# Altium PCB relay.PcbDoc (part 2 of 4)
Units mil, origin at the board's own origin, x right, y up, seen from the top; angles counter-clockwise.
Board outline 5718.69 x 3947.04 mil, 2 copper layers (Top Layer, Bottom Layer); 122 components, 108 nets, 435 pads, 81 vias.
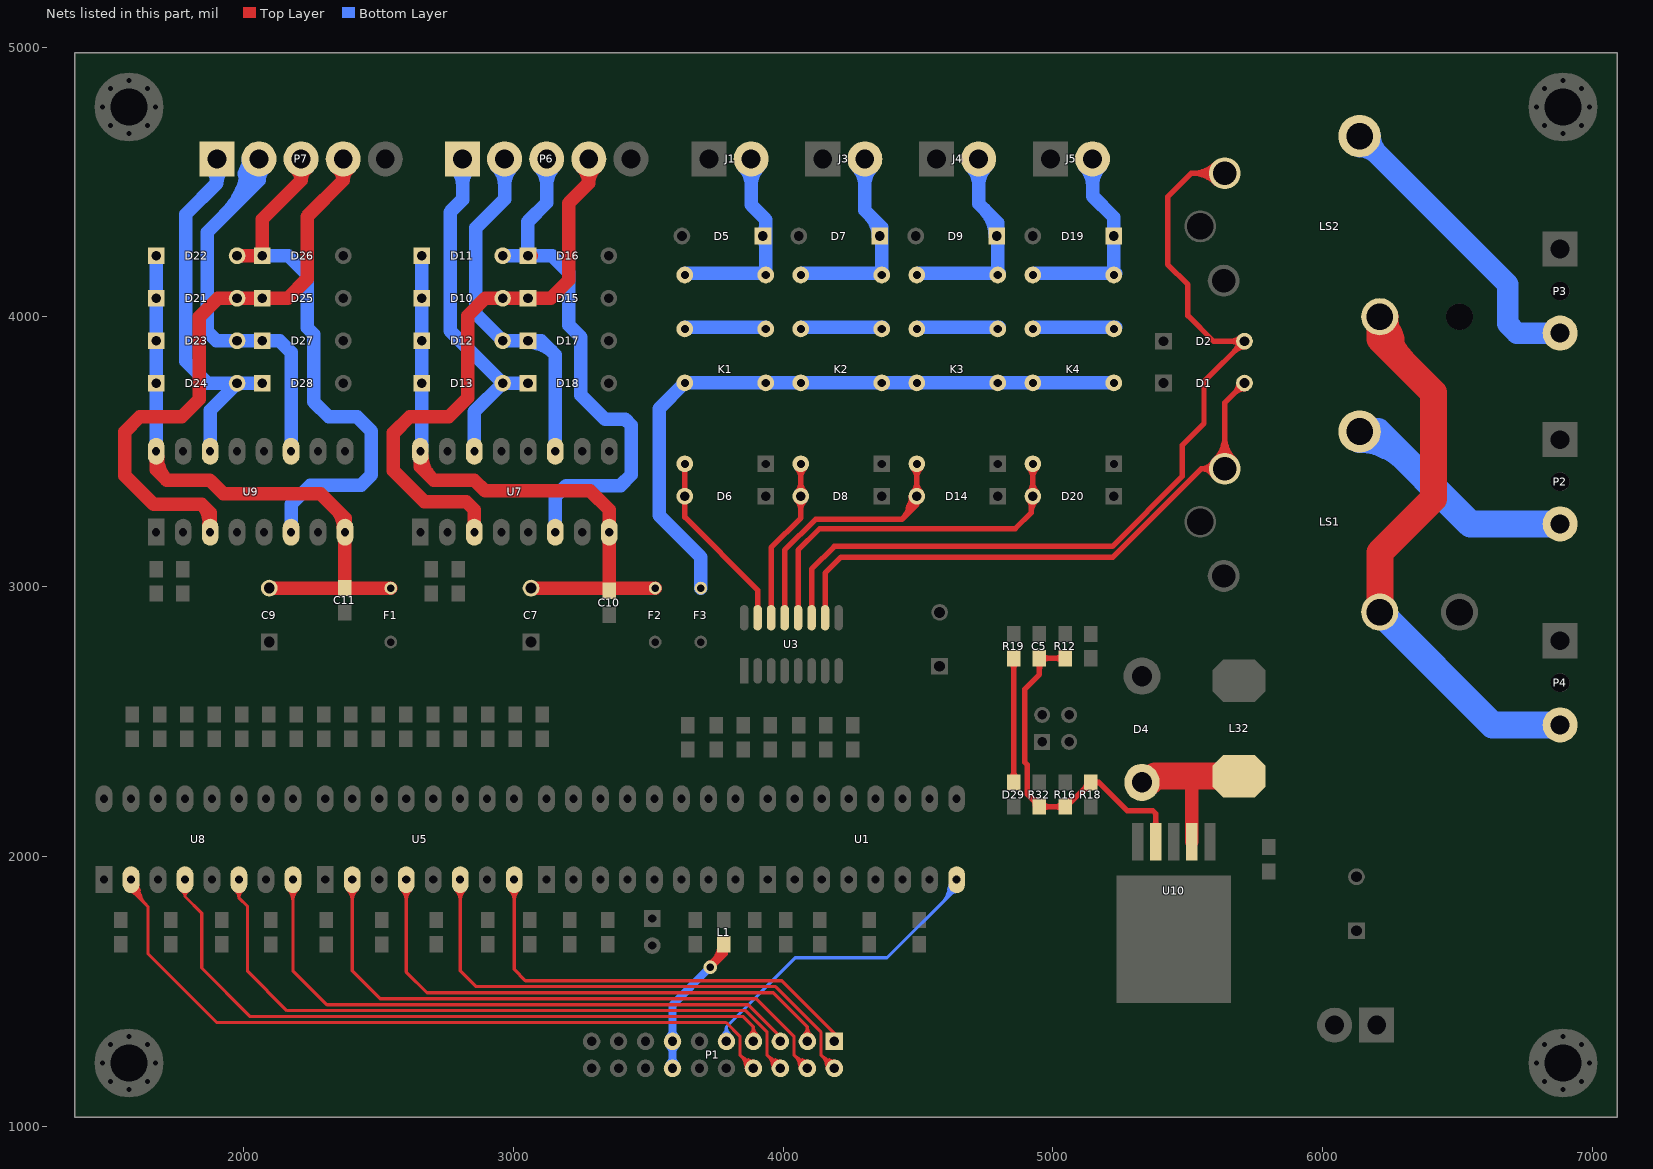
[diagram p2: the nets of this part, all layers, seen from the top]

## Via types
v1: diameter 50, hole 28, Top Layer to Bottom Layer, 42 vias
v2: diameter 50, hole 30, Top Layer to Bottom Layer, 36 vias
v3: diameter 80, hole 50, Top Layer to Bottom Layer, 2 vias
v4: diameter 100, hole 60, Top Layer to Bottom Layer, 1 vias

## Nets (pads, with @x,y where several pads share a name; then routed paths per layer and width w, separated by ;. In a path a pad name is that pad's centre, name@x,y a point inside that pad or via, vN(x,y) a via of type N, cw(c..) or ccw(c..) an arc to the next point about the centre after c; other vN are vias at no path point) (continued)
NetC5_2: C5.2 R12.1 R16.1 R18.1 R32.1 U10.4 | length 2898
  Top Layer w20: R12.1@5045,2735 C5.2@4950,2735 4950,2675 4895,2620 4895,2350 4905,2340 4905,2230 R32.1@4950,2185 R16.1@5045,2185 5050,2185 R18.1@5140,2275 5170,2275 ; U10.4@5381,2055 5381,2159 5370,2170 5275,2170 5170,2275 ; 4915.86,2219.14 ccw(c4950,2253.28) R32.1@4950,2205 ; 4915.86,2219.14 ccw(c4950,2253.28) R32.1@4950,2205 ; 4915.86,2219.14 ccw(c4950,2253.28) R32.1@4950,2205 ; R32.1@4927.93,2207.07 cw(c4910.86,2190) R32.1@4935,2190 ; R32.1@4927.93,2207.07 cw(c4910.86,2190) R32.1@4935,2190 ; R32.1@4927.93,2207.07 cw(c4910.86,2190) R32.1@4935,2190 ; C5.2@4939.39,2719.39 cw(c4913.79,2693.79) 4950,2693.79 ; C5.2@4939.39,2719.39 cw(c4913.79,2693.79) 4950,2693.79 ; C5.2@4939.39,2719.39 cw(c4913.79,2693.79) 4950,2693.79 ; 4950,2693.79 cw(c4986.21,2693.79) C5.2@4960.61,2719.39 ; 4950,2693.79 cw(c4986.21,2693.79) C5.2@4960.61,2719.39 ; 4950,2693.79 cw(c4986.21,2693.79) C5.2@4960.61,2719.39 ; R32.1@4960.61,2174.39 cw(c4986.21,2148.79) 4986.21,2185 ; R32.1@4960.61,2174.39 cw(c4986.21,2148.79) 4986.21,2185 ; R32.1@4960.61,2174.39 cw(c4986.21,2148.79) 4986.21,2185 ; R32.1@4960.61,2195.61 ccw(c4986.21,2221.21) 4986.21,2185 ; R32.1@4960.61,2195.61 ccw(c4986.21,2221.21) 4986.21,2185 ; R32.1@4960.61,2195.61 ccw(c4986.21,2221.21) 4986.21,2185 ; C5.2@4960.61,2724.39 cw(c4986.21,2698.79) 4986.21,2735 ; C5.2@4960.61,2724.39 cw(c4986.21,2698.79) 4986.21,2735 ; C5.2@4960.61,2724.39 cw(c4986.21,2698.79) 4986.21,2735 ; C5.2@4960.61,2745.61 ccw(c4986.21,2771.21) 4986.21,2735 ; C5.2@4960.61,2745.61 ccw(c4986.21,2771.21) 4986.21,2735 ; C5.2@4960.61,2745.61 ccw(c4986.21,2771.21) 4986.21,2735 ; 5008.79,2185 ccw(c5008.79,2221.21) R16.1@5034.39,2195.61 ; 5008.79,2185 cw(c5008.79,2148.79) R16.1@5034.39,2174.39 ; 5008.79,2185 ccw(c5008.79,2221.21) R16.1@5034.39,2195.61 ; 5008.79,2185 cw(c5008.79,2148.79) R16.1@5034.39,2174.39 ; 5008.79,2185 ccw(c5008.79,2221.21) R16.1@5034.39,2195.61 ; 5008.79,2185 cw(c5008.79,2148.79) R16.1@5034.39,2174.39 ; 5008.79,2735 ccw(c5008.79,2771.21) R12.1@5034.39,2745.61 ; 5008.79,2735 cw(c5008.79,2698.79) R12.1@5034.39,2724.39 ; 5008.79,2735 ccw(c5008.79,2771.21) R12.1@5034.39,2745.61 ; 5008.79,2735 cw(c5008.79,2698.79) R12.1@5034.39,2724.39 ; 5008.79,2735 ccw(c5008.79,2771.21) R12.1@5034.39,2745.61 ; 5008.79,2735 cw(c5008.79,2698.79) R12.1@5034.39,2724.39 ; R16.1@5045,2205 ccw(c5045,2265.36) 5087.68,2222.68 ; R16.1@5045,2205 ccw(c5045,2265.36) 5087.68,2222.68 ; R16.1@5045,2205 ccw(c5045,2265.36) 5087.68,2222.68 ; 5105.86,2240.86 cw(c5140,2206.72) R18.1@5140,2255 ; 5105.86,2240.86 cw(c5140,2206.72) R18.1@5140,2255 ; 5105.86,2240.86 cw(c5140,2206.72) R18.1@5140,2255 ; R18.1@5117.93,2252.93 ccw(c5100.86,2270) R18.1@5125,2270 ; R18.1@5117.93,2252.93 ccw(c5100.86,2270) R18.1@5125,2270 ; R18.1@5117.93,2252.93 ccw(c5100.86,2270) R18.1@5125,2270 ; R18.1@5152,2266 cw(c5170,2252.5) 5170,2275 ; R18.1@5152,2266 cw(c5170,2252.5) 5170,2275 ; R18.1@5152,2266 cw(c5170,2252.5) 5170,2275 ; R18.1@5152,2284 ccw(c5170,2297.5) 5170,2275 ; R18.1@5152,2284 ccw(c5170,2297.5) 5170,2275 ; R18.1@5152,2284 ccw(c5170,2297.5) 5170,2275 ; U10.4@5373.22,2110.68 ccw(c5354.44,2129.45) 5381,2129.45 ; U10.4@5373.22,2110.68 ccw(c5354.44,2129.45) 5381,2129.45 ; U10.4@5373.22,2110.68 ccw(c5354.44,2129.45) 5381,2129.45 ; 5381,2129.45 ccw(c5407.56,2129.45) U10.4@5388.78,2110.68 ; 5381,2129.45 ccw(c5407.56,2129.45) U10.4@5388.78,2110.68 ; 5381,2129.45 ccw(c5407.56,2129.45) U10.4@5388.78,2110.68
NetC7_1: C7.1 C10.2 D10.2 D11.2 D12.2 D13.2 F2.1 U7.8 U7.16 | length 2571.4
  Top Layer w50: U7.16@2660.43,3507.05 U7.16@2655.47,3502.09 2655.47,3445.16 2705.63,3395 2855.63,3395 2895.63,3355 3285.63,3355 3355.47,3285.16 U7.8@3355.47,3202.09 3355.63,3201.93 C10.2@3355.63,2995 ; C7.1@3065.63,2995 C10.2@3355.63,2995 ; C10.2@3355.63,2985 C10.2@3365.63,2995 ; F2.1@3525.63,2995 C10.2@3365.63,2995 ; U7.16@2661.47,3483.09 ccw(c2767.53,3483.09) 2692.54,3408.09 ; U7.16@2661.47,3483.09 ccw(c2767.53,3483.09) 2692.54,3408.09 ; U7.16@2661.47,3483.09 ccw(c2767.53,3483.09) 2692.54,3408.09 ; C10.2@3355.63,2995 C10.2@3365.63,2995
  Bottom Layer w50: U7.16@2655.47,3502.09 2660.43,3507.05 D10.2@2660.43,4069.49 D11.2@2660.43,4226.97
NetC9_1: C9.1 C11.2 D21.2 D22.2 D23.2 D24.2 F1.1 U9.8 U9.16 | length 2805
  Top Layer w30: C9.1@2085.63,2985 C9.1@2095.63,2995
  Top Layer w50: U9.16@1676.18,3502.09 1676.18,3434.45 1715.63,3395 ; C9.1@2095.63,2995 C11.2@2375.63,2995 ; F1.1@2545.63,2995 C11.2@2375.63,2995 ; U9.16@1682.17,3482.75 ccw(c1796.84,3476.22) 1715.63,3395 ; U9.16@1682.17,3482.75 ccw(c1796.84,3476.22) 1715.63,3395 ; U9.16@1682.17,3482.75 ccw(c1796.84,3476.22) 1715.63,3395 ; 1715.63,3395 1875.63,3395 1925.63,3345 2285.63,3345 2376.18,3254.45 U9.8@2376.18,3202.09 2375.63,3201.54 C11.2@2375.63,2995 ; 2342.35,3288.28 cw(c2275.15,3221.09) U9.8@2370.18,3221.09 ; 2342.35,3288.28 cw(c2275.15,3221.09) U9.8@2370.18,3221.09 ; 2342.35,3288.28 cw(c2275.15,3221.09) U9.8@2370.18,3221.09
  Bottom Layer w50: U9.16@1676.18,3502.09 D24.2@1676.18,3754.53 D23.2@1676.18,3912.01 D21.2@1676.18,4069.49 D22.2@1676.18,4226.97
NetD1_1: D1.1 LS1.5 U3.10 | length 3853.3
  Top Layer w20: U3.10@4155.63,2885 4155.63,3050.63 4215,3110 5222.43,3110 5550.03,3437.6 ; D1.1@5710,3755 5636.73,3681.73 LS1.5@5636.73,3437.6 5550.03,3437.6 ; 5550.03,3437.6 ccw(c5550.03,3489.69) LS1.5@5594.68,3462.86 ; 5550.03,3437.6 cw(c5550.03,3385.5) LS1.5@5594.68,3412.33 ; 5550.03,3437.6 ccw(c5550.03,3489.69) LS1.5@5594.68,3462.86 ; 5550.03,3437.6 cw(c5550.03,3385.5) LS1.5@5594.68,3412.33 ; 5550.03,3437.6 ccw(c5550.03,3489.69) LS1.5@5594.68,3462.86 ; 5550.03,3437.6 cw(c5550.03,3385.51) LS1.5@5594.68,3412.34 ; LS1.5@5602.05,3472.29 ccw(c5518.3,3556.03) 5636.73,3556.03 ; LS1.5@5602.05,3472.29 ccw(c5518.3,3556.03) 5636.73,3556.03 ; LS1.5@5602.05,3472.29 ccw(c5518.3,3556.03) 5636.73,3556.03 ; LS1.5@5616.19,3458.14 ccw(c5566.59,3507.74) 5636.73,3507.74 ; LS1.5@5616.19,3458.14 ccw(c5566.59,3507.74) 5636.73,3507.74 ; LS1.5@5616.19,3458.14 ccw(c5566.59,3507.74) 5636.73,3507.74 ; 5636.73,3507.74 ccw(c5706.88,3507.74) LS1.5@5657.28,3458.14 ; 5636.73,3507.74 ccw(c5706.88,3507.74) LS1.5@5657.28,3458.14 ; 5636.73,3507.74 ccw(c5706.88,3507.74) LS1.5@5657.28,3458.14 ; 5636.73,3556.03 ccw(c5755.16,3556.03) LS1.5@5671.42,3472.29 ; 5636.73,3556.03 ccw(c5755.16,3556.03) LS1.5@5671.42,3472.29 ; 5636.73,3556.03 ccw(c5755.16,3556.03) LS1.5@5671.42,3472.29 ; 5674.15,3719.15 ccw(c5638.3,3755) D1.1@5689,3755 ; 5674.15,3719.15 cw(c5710,3683.3) D1.1@5710,3734 ; 5674.15,3719.15 ccw(c5638.3,3755) D1.1@5689,3755 ; 5674.15,3719.15 cw(c5710,3683.3) D1.1@5710,3734 ; 5674.15,3719.15 ccw(c5638.3,3755) D1.1@5689,3755 ; 5674.15,3719.15 cw(c5710,3683.3) D1.1@5710,3734 ; 5681.49,3726.98 cw(c5717.73,3717.27) D1.1@5710.2,3754.02 ; 5681.49,3726.98 cw(c5717.73,3717.27) D1.1@5710.2,3754.02 ; 5681.49,3726.98 cw(c5717.73,3717.27) D1.1@5710.2,3754.02 ; 5681.98,3726.49 ccw(c5672.27,3762.73) D1.1@5709.02,3755.2 ; 5681.98,3726.49 ccw(c5672.27,3762.73) D1.1@5709.02,3755.2 ; 5681.98,3726.49 ccw(c5672.27,3762.73) D1.1@5709.02,3755.2
NetD2_1: D2.1 LS2.5 U3.11 | length 4876.9
  Top Layer w20: U3.11@4105.63,2885 4105.63,3065.63 4190,3150 5220,3150 5480,3410 5480,3525 5560,3605 5560,3760 D2.1@5710,3910 5595,3910 5500,4005 5500,4120 5425,4195 5425,4445 5512.4,4532.4 LS2.5@5636.73,4532.4 ; 5518.3,4532.4 ccw(c5518.3,4650.83) LS2.5@5602.05,4567.09 ; 5518.3,4532.4 cw(c5518.3,4413.97) LS2.5@5602.05,4497.71 ; 5518.3,4532.4 ccw(c5518.3,4650.83) LS2.5@5602.05,4567.09 ; 5518.3,4532.4 cw(c5518.3,4413.97) LS2.5@5602.05,4497.71 ; 5518.3,4532.4 ccw(c5518.3,4650.83) LS2.5@5602.05,4567.09 ; 5518.3,4532.4 cw(c5518.3,4413.97) LS2.5@5602.05,4497.71 ; 5566.59,4532.4 ccw(c5566.59,4602.55) LS2.5@5616.19,4552.95 ; 5566.59,4532.4 cw(c5566.59,4462.26) LS2.5@5616.19,4511.86 ; 5566.59,4532.4 ccw(c5566.59,4602.55) LS2.5@5616.19,4552.95 ; 5566.59,4532.4 cw(c5566.59,4462.26) LS2.5@5616.19,4511.86 ; 5566.59,4532.4 ccw(c5566.59,4602.55) LS2.5@5616.19,4552.95 ; 5566.59,4532.4 cw(c5566.59,4462.26) LS2.5@5616.19,4511.86 ; 5659.3,3910 ccw(c5659.3,3960.7) D2.1@5695.15,3924.85 ; 5659.3,3910 cw(c5659.3,3859.3) D2.1@5695.15,3895.15 ; 5659.3,3910 ccw(c5659.3,3960.7) D2.1@5695.15,3924.85 ; 5659.3,3910 cw(c5659.3,3859.3) D2.1@5695.15,3895.15 ; 5659.3,3910 ccw(c5659.3,3960.7) D2.1@5695.15,3924.85 ; 5659.3,3910 cw(c5659.3,3859.3) D2.1@5695.15,3895.15 ; 5674.15,3874.15 ccw(c5638.3,3910) D2.1@5689,3910 ; 5674.15,3874.15 cw(c5710,3838.3) D2.1@5710,3889 ; 5674.15,3874.15 ccw(c5638.3,3910) D2.1@5689,3910 ; 5674.15,3874.15 cw(c5710,3838.3) D2.1@5710,3889 ; 5674.15,3874.15 ccw(c5638.3,3910) D2.1@5689,3910 ; 5674.15,3874.15 cw(c5710,3838.3) D2.1@5710,3889 ; 5681.49,3881.98 cw(c5717.73,3872.27) D2.1@5710.2,3909.02 ; 5681.49,3881.98 cw(c5717.73,3872.27) D2.1@5710.2,3909.02 ; 5681.49,3881.98 cw(c5717.73,3872.27) D2.1@5710.2,3909.02 ; 5681.98,3881.49 ccw(c5672.27,3917.73) D2.1@5709.02,3910.2 ; 5681.98,3881.49 ccw(c5672.27,3917.73) D2.1@5709.02,3910.2 ; 5681.98,3881.49 ccw(c5672.27,3917.73) D2.1@5709.02,3910.2
NetD4_2: D4.2 L32.1 U10.2 | length 886.8
  Top Layer w50: U10.2@5515,2055 5515,2265 5525,2275 ; L32.1@5625.99,2328.21 cw(c5525.01,2397.41) 5525.01,2275 ; L32.1@5690,2297.83 5667.17,2275 5525,2275
  Top Layer w100: D4.2@5330,2275 5355,2275 5377.83,2297.83 L32.1@5690,2297.83
NetD5_2: D5.2 J1.2 K1.8 K1.9 | length 1446.7
  Bottom Layer w50: K1.9@3636.36,4161.3 K1.8@3935.63,4161.3 ; J1.2@3881.63,4585.55 3881.63,4415 3935.63,4361 K1.8@3935.63,4161.3 ; K1.8@3935.63,4155.55 K1.8@3935.63,4161.3 ; K1.8@3936.36,4161.3 K1.8@3935.63,4161.3 ; J1.2@3853.35,4557.27 cw(c3785.06,4488.98) 3881.63,4488.98 ; J1.2@3853.35,4557.27 cw(c3785.06,4488.98) 3881.63,4488.98 ; J1.2@3853.35,4557.27 cw(c3785.06,4488.98) 3881.63,4488.98 ; 3881.63,4488.98 cw(c3978.2,4488.98) J1.2@3909.91,4557.27 ; 3881.63,4488.98 cw(c3978.2,4488.98) J1.2@3909.91,4557.27 ; 3881.63,4488.98 cw(c3978.2,4488.98) J1.2@3909.91,4557.27 ; D5.2@3920.76,4295.76 cw(c3884.85,4259.85) 3935.63,4259.85 ; D5.2@3920.76,4295.76 cw(c3884.85,4259.85) 3935.63,4259.85 ; D5.2@3920.76,4295.76 cw(c3884.85,4259.85) 3935.63,4259.85 ; D5.2@3920.76,4304.24 ccw(c3884.85,4340.15) 3935.63,4340.15 ; D5.2@3920.76,4304.24 ccw(c3884.85,4340.15) 3935.63,4340.15 ; D5.2@3920.76,4304.24 ccw(c3884.85,4340.15) 3935.63,4340.15
NetD6_1: D6.1 K1.16 U3.15 | length 682.4
  Top Layer w20: K1.16@3635.63,3455.55 D6.1@3635.63,3335.55 3635.63,3258.01 3905.63,2988.01 U3.15@3905.63,2885
NetD7_2: D7.2 J3.2 K2.8 K2.9 | length 1665.3
  Bottom Layer w50: K2.9@4068.36,4161.3 K2.8@4365.63,4161.3 ; J3.2@4302.73,4585.55 4302.73,4395 4365.63,4332.1 ; D7.2@4358.33,4300 D7.2@4365.63,4292.7 ; K2.8@4365.63,4155.55 K2.8@4365.63,4161.3 ; K2.8@4368.36,4161.3 K2.8@4365.63,4161.3 ; J3.2@4274.45,4557.27 cw(c4206.16,4488.98) 4302.73,4488.98 ; J3.2@4274.45,4557.27 cw(c4206.16,4488.98) 4302.73,4488.98 ; J3.2@4274.45,4557.27 cw(c4206.16,4488.98) 4302.73,4488.98 ; 4302.73,4488.98 cw(c4399.3,4488.98) J3.2@4331.02,4557.27 ; 4302.73,4488.98 cw(c4399.3,4488.98) J3.2@4331.02,4557.27 ; 4302.73,4488.98 cw(c4399.3,4488.98) J3.2@4331.02,4557.27 ; 4320.23,4377.5 cw(c4242.73,4300) D7.2@4352.33,4300 ; 4320.23,4377.5 cw(c4242.73,4300) D7.2@4352.33,4300 ; 4320.23,4377.5 cw(c4242.73,4300) D7.2@4352.33,4300 ; D7.2@4354.09,4295.76 cw(c4326.23,4267.9) 4365.63,4267.9 ; D7.2@4354.09,4295.76 cw(c4326.23,4267.9) 4365.63,4267.9 ; D7.2@4354.09,4295.76 cw(c4326.23,4267.9) 4365.63,4267.9 ; D7.2@4354.09,4304.24 ccw(c4326.23,4332.1) 4365.63,4332.1 ; D7.2@4354.09,4304.24 ccw(c4326.23,4332.1) 4365.63,4332.1 ; D7.2@4354.09,4304.24 ccw(c4326.23,4332.1) 4365.63,4332.1 ; K2.8@4365.63,4161.3 D7.2@4365.63,4292.7 ; D7.2@4365.63,4292.7 4365.63,4332.1
NetD8_1: D8.1 K2.16 U3.14 | length 1332.8
  Top Layer w20: U3.14@3955.63,2885 3955.63,3145.63 4065.63,3255.63 D8.1@4065.63,3335.55 K2.16@4065.63,3455.55 ; D8.1@4050.78,3320.7 cw(c4014.93,3284.85) 4065.63,3284.85 ; D8.1@4050.78,3320.7 cw(c4014.93,3284.85) 4065.63,3284.85 ; D8.1@4050.78,3320.7 cw(c4014.93,3284.85) 4065.63,3284.85 ; D8.1@4050.78,3350.4 ccw(c4014.93,3386.25) 4065.63,3386.25 ; D8.1@4050.78,3350.4 ccw(c4014.93,3386.25) 4065.63,3386.25 ; D8.1@4050.78,3350.4 ccw(c4014.93,3386.25) 4065.63,3386.25 ; K2.16@4050.78,3440.7 cw(c4014.93,3404.85) 4065.63,3404.85 ; K2.16@4050.78,3440.7 cw(c4014.93,3404.85) 4065.63,3404.85 ; K2.16@4050.78,3440.7 cw(c4014.93,3404.85) 4065.63,3404.85 ; 4065.63,3284.85 cw(c4116.33,3284.85) D8.1@4080.48,3320.7 ; 4065.63,3284.85 cw(c4116.33,3284.85) D8.1@4080.48,3320.7 ; 4065.63,3284.85 cw(c4116.33,3284.85) D8.1@4080.48,3320.7 ; 4065.63,3386.25 ccw(c4116.33,3386.25) D8.1@4080.48,3350.4 ; 4065.63,3386.25 ccw(c4116.33,3386.25) D8.1@4080.48,3350.4 ; 4065.63,3386.25 ccw(c4116.33,3386.25) D8.1@4080.48,3350.4 ; 4065.63,3404.85 cw(c4116.33,3404.85) K2.16@4080.48,3440.7 ; 4065.63,3404.85 cw(c4116.33,3404.85) K2.16@4080.48,3440.7 ; 4065.63,3404.85 cw(c4116.33,3404.85) K2.16@4080.48,3440.7
NetD9_2: D9.2 J4.2 K3.8 K3.9 | length 1550.4
  Bottom Layer w50: K3.9@4500.36,4161.3 K3.8@4795.63,4161.3 ; J4.2@4724.73,4585.55 4724.73,4420 4795.63,4349.1 K3.8@4795.63,4161.3 ; K3.8@4795.63,4155.55 K3.8@4795.63,4161.3 ; K3.8@4800.36,4161.3 K3.8@4795.63,4161.3 ; J4.2@4696.45,4557.27 cw(c4628.16,4488.98) 4724.73,4488.98 ; J4.2@4696.45,4557.27 cw(c4628.16,4488.98) 4724.73,4488.98 ; J4.2@4696.45,4557.27 cw(c4628.16,4488.98) 4724.73,4488.98 ; 4724.73,4488.98 cw(c4821.3,4488.98) J4.2@4753.02,4557.27 ; 4724.73,4488.98 cw(c4821.3,4488.98) J4.2@4753.02,4557.27 ; 4724.73,4488.98 cw(c4821.3,4488.98) J4.2@4753.02,4557.27 ; 4743.9,4400.83 cw(c4643.07,4300) D9.2@4785.67,4300 ; 4743.9,4400.83 cw(c4643.07,4300) D9.2@4785.67,4300 ; 4743.9,4400.83 cw(c4643.07,4300) D9.2@4785.67,4300
NetD10_1: D10.1 D15.2 P6.4 U7.3 | length 2529.1
  Top Layer w50: U7.3@2855.47,3202.09 2855.47,3285.16 2825.63,3315 2670.63,3315 2555.63,3430 2555.63,3570 2615.63,3630 2760.63,3630 2830.63,3700 2830.63,4005 2895.12,4069.49 D10.1@2960.43,4069.49 D15.2@3054.13,4069.49 3139.49,4069.49 3205.63,4135.63 3205.63,4422.16 3279.73,4496.26 ; P6.4@3279.73,4585.55 3279.73,4496.26 ; P6.4@3253.1,4555.7 cw(c3200.08,4496.26) 3279.73,4496.26 ; P6.4@3253.1,4555.7 cw(c3200.08,4496.26) 3279.73,4496.26 ; P6.4@3253.1,4555.7 cw(c3200.08,4496.26) 3279.73,4496.26 ; 3279.73,4496.26 cw(c3359.39,4496.26) P6.4@3306.36,4555.7 ; 3279.73,4496.26 cw(c3359.39,4496.26) P6.4@3306.36,4555.7 ; 3279.73,4496.26 cw(c3359.39,4496.26) P6.4@3306.36,4555.7
NetD11_1: D11.1 D16.2 P6.3 U7.6 | length 2463.1
  Top Layer w50: D16.2@3054.13,4226.97 D16.2@3066.1,4226.97
  Bottom Layer w50: D11.1@2960.43,4226.97 D16.2@3054.13,4226.97 ; P6.3@3123.73,4585.55 3123.73,4423.1 3054.13,4353.5 D16.2@3054.13,4226.97 ; U7.6@3155.47,3202.09 3155.47,3334.84 3195.63,3375 3397.38,3375 3437.38,3415 3437.38,3598.25 3415.63,3620 3340.63,3620 3250.63,3710 3250.63,3925 3205.63,3970 3205.63,4165 3143.66,4226.97 D16.2@3054.13,4226.97 ; P6.3@3095.45,4557.27 cw(c3027.16,4488.98) 3123.73,4488.98 ; P6.3@3095.45,4557.27 cw(c3027.16,4488.98) 3123.73,4488.98 ; P6.3@3095.45,4557.27 cw(c3027.16,4488.98) 3123.73,4488.98 ; 3123.73,4488.98 cw(c3220.3,4488.98) P6.3@3152.02,4557.27 ; 3123.73,4488.98 cw(c3220.3,4488.98) P6.3@3152.02,4557.27 ; 3123.73,4488.98 cw(c3220.3,4488.98) P6.3@3152.02,4557.27
NetD12_1: D12.1 D17.2 P6.2 U7.11 | length 2104.5
  Bottom Layer w50: P6.2@2967.73,4585.55 2967.73,4437.1 2860.63,4330 2860.63,4011.81 D12.1@2960.43,3912.01 D17.2@3054.13,3912.01 3103.62,3912.01 3155.47,3860.16 U7.11@3155.47,3502.09 ; P6.2@2939.45,4557.27 cw(c2871.16,4488.98) 2967.73,4488.98 ; P6.2@2939.45,4557.27 cw(c2871.16,4488.98) 2967.73,4488.98 ; P6.2@2939.45,4557.27 cw(c2871.16,4488.98) 2967.73,4488.98 ; 2967.73,4488.98 cw(c3064.3,4488.98) P6.2@2996.02,4557.27 ; 2967.73,4488.98 cw(c3064.3,4488.98) P6.2@2996.02,4557.27 ; 2967.73,4488.98 cw(c3064.3,4488.98) P6.2@2996.02,4557.27 ; D17.2@3054.13,3906.01 cw(c3054.13,3772.05) 3148.86,3866.77 ; D17.2@3054.13,3906.01 cw(c3054.13,3772.05) 3148.86,3866.77 ; D17.2@3054.13,3906.01 cw(c3054.13,3772.05) 3148.86,3866.77
NetD13_1: D13.1 D18.2 P6.1 U7.14 | length 1775.5
  Bottom Layer w50: P6.1@2811.73,4585.55 2811.73,4435 2765.63,4388.9 2765.63,3949.33 D13.1@2960.43,3754.53 ; U7.14@2855.47,3502.09 2855.47,3649.57 D13.1@2960.43,3754.53 ; D18.2@3054.13,3754.53 D13.1@2960.43,3754.53 ; P6.1@2783.45,4557.27 cw(c2715.16,4488.98) 2811.73,4488.98 ; P6.1@2783.45,4557.27 cw(c2715.16,4488.98) 2811.73,4488.98 ; P6.1@2783.45,4557.27 cw(c2715.16,4488.98) 2811.73,4488.98 ; 2811.73,4488.98 cw(c2908.3,4488.98) P6.1@2840.02,4557.27 ; 2811.73,4488.98 cw(c2908.3,4488.98) P6.1@2840.02,4557.27 ; 2811.73,4488.98 cw(c2908.3,4488.98) P6.1@2840.02,4557.27
NetD14_1: D14.1 K3.16 U3.13 | length 2266.6
  Top Layer w20: U3.13@4005.63,2885 4005.63,3135.63 4120,3250 4440,3250 ; D14.1@4475.52,3329.5 cw(c4454.74,3323.25) 4470.29,3308.12 cw(c4487.35,3291.53) D14.1@4491.75,3314.91 ; K3.16@4495.63,3455.55 D14.1@4495.63,3335.55 4495.63,3305.63 4440,3250 ; 4440,3250 ccw(c4356.38,3333.63) D14.1@4474.63,3335.26 ; 4440,3250 ccw(c4356.38,3333.63) D14.1@4474.63,3335.26 ; 4440,3250 ccw(c4356.38,3333.63) D14.1@4474.63,3335.26 ; 4463.35,3290.72 cw(c4532.83,3273.12) D14.1@4496.14,3334.69 ; 4463.35,3290.72 cw(c4532.83,3273.12) D14.1@4496.14,3334.69 ; 4463.35,3290.72 cw(c4532.83,3273.12) D14.1@4496.14,3334.69 ; 4473.49,3283.49 ccw(c4422.44,3334.54) D14.1@4494.63,3335.54 ; 4473.49,3283.49 ccw(c4422.44,3334.54) D14.1@4494.63,3335.54 ; 4473.49,3283.49 ccw(c4422.44,3334.54) D14.1@4494.63,3335.54 ; D14.1@4479.47,3322.14 cw(c4458.08,3304.4) 4485.02,3297.58 ; D14.1@4479.47,3322.14 cw(c4458.08,3304.4) 4485.02,3297.58 ; D14.1@4479.47,3322.14 cw(c4458.08,3304.4) 4485.02,3297.58 ; D14.1@4480.78,3350.4 ccw(c4444.93,3386.25) 4495.63,3386.25 ; D14.1@4480.78,3350.4 ccw(c4444.93,3386.25) 4495.63,3386.25 ; D14.1@4480.78,3350.4 ccw(c4444.93,3386.25) 4495.63,3386.25 ; K3.16@4480.78,3440.7 cw(c4444.93,3404.85) 4495.63,3404.85 ; K3.16@4480.78,3440.7 cw(c4444.93,3404.85) 4495.63,3404.85 ; K3.16@4480.78,3440.7 cw(c4444.93,3404.85) 4495.63,3404.85 ; 4485.02,3297.58 cw(c4509.59,3291.36) D14.1@4501.95,3315.53 ; 4485.02,3297.58 cw(c4509.59,3291.36) D14.1@4501.95,3315.53 ; 4485.02,3297.58 cw(c4509.59,3291.36) D14.1@4501.95,3315.53 ; 4495.63,3386.25 ccw(c4546.33,3386.25) D14.1@4510.48,3350.4 ; 4495.63,3386.25 ccw(c4546.33,3386.25) D14.1@4510.48,3350.4 ; 4495.63,3386.25 ccw(c4546.33,3386.25) D14.1@4510.48,3350.4 ; 4495.63,3404.85 cw(c4546.33,3404.85) K3.16@4510.48,3440.7 ; 4495.63,3404.85 cw(c4546.33,3404.85) K3.16@4510.48,3440.7 ; 4495.63,3404.85 cw(c4546.33,3404.85) K3.16@4510.48,3440.7
NetD19_2: D19.2 J5.2 K4.8 K4.9 | length 1217.7
  Bottom Layer w50: K4.9@4932.36,4161.3 K4.8@5225.63,4161.3 ; J5.2@5146.73,4585.55 5146.73,4448.27 5225.63,4369.37 K4.8@5225.63,4161.3 ; K4.8@5225.63,4155.55 K4.8@5225.63,4161.3 ; K4.8@5232.36,4161.3 K4.8@5225.63,4161.3 ; J5.2@5118.45,4557.27 cw(c5050.16,4488.98) 5146.73,4488.98 ; J5.2@5118.45,4557.27 cw(c5050.16,4488.98) 5146.73,4488.98 ; J5.2@5118.45,4557.27 cw(c5050.16,4488.98) 5146.73,4488.98 ; 5146.73,4488.98 cw(c5243.3,4488.98) J5.2@5175.02,4557.27 ; 5146.73,4488.98 cw(c5243.3,4488.98) J5.2@5175.02,4557.27 ; 5146.73,4488.98 cw(c5243.3,4488.98) J5.2@5175.02,4557.27
NetD20_1: D20.1 K4.16 U3.12 | length 2060.7
  Top Layer w20: U3.12@4055.63,2885 4055.63,3135.63 4135,3215 4860,3215 4920.04,3275.04 4920.04,3329.96 D20.1@4925.63,3335.55 K4.16@4925.63,3455.55 ; D20.1@4910.78,3320.7 cw(c4888.43,3298.35) 4920.04,3298.35 ; D20.1@4910.78,3320.7 cw(c4888.43,3298.35) 4920.04,3298.35 ; D20.1@4910.78,3320.7 cw(c4888.43,3298.35) 4920.04,3298.35 ; D20.1@4910.78,3350.4 ccw(c4874.93,3386.25) 4925.63,3386.25 ; D20.1@4910.78,3350.4 ccw(c4874.93,3386.25) 4925.63,3386.25 ; D20.1@4910.78,3350.4 ccw(c4874.93,3386.25) 4925.63,3386.25 ; K4.16@4910.78,3440.7 cw(c4874.93,3404.85) 4925.63,3404.85 ; K4.16@4910.78,3440.7 cw(c4874.93,3404.85) 4925.63,3404.85 ; K4.16@4910.78,3440.7 cw(c4874.93,3404.85) 4925.63,3404.85 ; 4920.04,3274.78 cw(c4981.77,3274.78) D20.1@4939.88,3320.13 ; 4920.04,3274.78 cw(c4981.77,3274.78) D20.1@4939.88,3320.13 ; 4920.04,3274.78 cw(c4981.77,3274.78) D20.1@4939.88,3320.13 ; 4925.63,3386.25 ccw(c4976.33,3386.25) D20.1@4940.48,3350.4 ; 4925.63,3386.25 ccw(c4976.33,3386.25) D20.1@4940.48,3350.4 ; 4925.63,3386.25 ccw(c4976.33,3386.25) D20.1@4940.48,3350.4 ; 4925.63,3404.85 cw(c4976.33,3404.85) K4.16@4940.48,3440.7 ; 4925.63,3404.85 cw(c4976.33,3404.85) K4.16@4940.48,3440.7 ; 4925.63,3404.85 cw(c4976.33,3404.85) K4.16@4940.48,3440.7
NetD21_1: D21.1 D25.2 P7.4 U9.3 | length 2794.9
  Top Layer w50: U9.3@1876.18,3202.09 1876.18,3274.45 1845.63,3305 ; P7.4@2369.47,4585.55 2369.47,4506.26 ; 1845.63,3305 cw(c1781.45,3240.82) U9.3@1870.31,3222.31 ; 1845.63,3305 cw(c1781.45,3240.82) U9.3@1870.31,3222.31 ; 1845.63,3305 cw(c1781.45,3240.82) U9.3@1870.31,3222.31 ; 1845.63,3305 1666.81,3305 1560.63,3411.18 1560.63,3575 1615.63,3630 1770.63,3630 1835.63,3695 1835.63,4000 1905.12,4069.49 D21.1@1976.18,4069.49 D25.2@2069.88,4069.49 2164.49,4069.49 2235.47,4140.47 2235.47,4372.26 2369.47,4506.26 ; P7.4@2345.7,4553.38 cw(c2310.89,4506.26) 2369.47,4506.26 ; P7.4@2345.7,4553.38 cw(c2310.89,4506.26) 2369.47,4506.26 ; P7.4@2345.7,4553.38 cw(c2310.89,4506.26) 2369.47,4506.26 ; 2369.47,4506.26 cw(c2428.05,4506.26) P7.4@2393.24,4553.38 ; 2369.47,4506.26 cw(c2428.05,4506.26) P7.4@2393.24,4553.38 ; 2369.47,4506.26 cw(c2428.05,4506.26) P7.4@2393.24,4553.38
NetD22_1: D22.1 D26.2 P7.3 U9.6 | length 2383.9
  Top Layer w50: D22.1@1976.18,4226.97 D26.2@2069.88,4226.97 2069.88,4362.67 2213.47,4506.26 ; P7.3@2213.47,4585.55 2213.47,4506.26 ; P7.3@2189.7,4553.38 cw(c2154.89,4506.26) 2213.47,4506.26 ; P7.3@2189.7,4553.38 cw(c2154.89,4506.26) 2213.47,4506.26 ; P7.3@2189.7,4553.38 cw(c2154.89,4506.26) 2213.47,4506.26 ; 2213.47,4506.26 cw(c2272.05,4506.26) P7.3@2237.24,4553.38 ; 2213.47,4506.26 cw(c2272.05,4506.26) P7.3@2237.24,4553.38 ; 2213.47,4506.26 cw(c2272.05,4506.26) P7.3@2237.24,4553.38
  Bottom Layer w50: D26.2@2069.88,4226.97 2165.47,4226.97 2236.18,4156.26 2236.18,3959.45 2260.63,3935 2260.63,3685 2315.63,3630 2420.63,3630 2474.13,3576.5 2474.13,3415 2435.63,3376.5 2247.13,3376.5 2176.18,3305.55 U9.6@2176.18,3202.09
NetD23_1: D23.1 D27.2 P7.2 U9.11 | length 3326.2
  Bottom Layer w50: P7.2@2057.47,4585.55 2057.47,4506.26 ; U9.11@2176.18,3502.09 2176.18,3869.45 2133.62,3912.01 D27.2@2069.88,3912.01 D23.1@1976.18,3912.01 1899.8,3912.01 1865.47,3946.34 1865.47,4314.26 2057.47,4506.26 ; 1933.12,4381.91 ccw(c1729.48,4585.55) P7.2@2017.47,4585.55 ; 1933.12,4381.91 ccw(c1729.48,4585.55) P7.2@2017.47,4585.55 ; 1933.12,4381.91 ccw(c1729.48,4585.55) P7.2@2017.47,4585.55 ; 2002.26,4528.77 cw(c2106.36,4500.88) P7.2@2052.47,4594.21 ; 2002.26,4528.77 cw(c2106.36,4500.88) P7.2@2052.47,4594.21 ; 2002.26,4528.77 cw(c2106.36,4500.88) P7.2@2052.47,4594.21 ; 2018.48,4467.26 ccw(c1900.19,4585.55) P7.2@2067.47,4585.55 ; 2018.48,4467.26 ccw(c1900.19,4585.55) P7.2@2067.47,4585.55 ; 2018.48,4467.26 ccw(c1900.19,4585.55) P7.2@2067.47,4585.55 ; P7.2@2033.7,4553.38 cw(c1998.89,4506.26) 2057.47,4506.26 ; P7.2@2033.7,4553.38 cw(c1998.89,4506.26) 2057.47,4506.26 ; P7.2@2033.7,4553.38 cw(c1998.89,4506.26) 2057.47,4506.26 ; P7.2@2036.2,4551.68 cw(c2020.03,4525.94) 2049.39,4518.07 ; P7.2@2036.2,4551.68 cw(c2020.03,4525.94) 2049.39,4518.07 ; P7.2@2036.2,4551.68 cw(c2020.03,4525.94) 2049.39,4518.07 ; 2049.39,4518.07 cw(c2097.44,4505.2) P7.2@2075.29,4549.74 ; 2049.39,4518.07 cw(c2097.44,4505.2) P7.2@2075.29,4549.74 ; 2049.39,4518.07 cw(c2097.44,4505.2) P7.2@2075.29,4549.74 ; 2057.47,4506.26 cw(c2116.05,4506.26) P7.2@2081.24,4553.38 ; 2057.47,4506.26 cw(c2116.05,4506.26) P7.2@2081.24,4553.38 ; 2057.47,4506.26 cw(c2116.05,4506.26) P7.2@2081.24,4553.38
NetD24_1: D24.1 D28.2 P7.1 U9.14 | length 1812
  Bottom Layer w50: U9.14@1876.18,3502.09 1876.18,3654.53 D24.1@1976.18,3754.53 ; P7.1@1901.47,4585.55 1901.47,4496.26 ; D28.2@2069.88,3754.53 D24.1@1976.18,3754.53 ; P7.1@1874.84,4555.7 cw(c1821.82,4496.26) 1901.47,4496.26 ; P7.1@1874.84,4555.7 cw(c1821.82,4496.26) 1901.47,4496.26 ; P7.1@1874.84,4555.7 cw(c1821.82,4496.26) 1901.47,4496.26 ; 1901.47,4496.26 cw(c1981.13,4496.26) P7.1@1928.1,4555.7 ; 1901.47,4496.26 cw(c1981.13,4496.26) P7.1@1928.1,4555.7 ; 1901.47,4496.26 cw(c1981.13,4496.26) P7.1@1928.1,4555.7 ; 1901.47,4496.26 1785.47,4380.26 1785.47,3836.34 1867.28,3754.53 D24.1@1976.18,3754.53
NetD29_1: D29.1 R19.1 | length 801.3
  Top Layer w20: D29.1@4855,2275 R19.1@4855,2735 ; D29.1@4844.39,2290.61 ccw(c4818.79,2316.21) 4855,2316.21 ; D29.1@4844.39,2290.61 ccw(c4818.79,2316.21) 4855,2316.21 ; D29.1@4844.39,2290.61 ccw(c4818.79,2316.21) 4855,2316.21 ; R19.1@4844.39,2719.39 cw(c4818.79,2693.79) 4855,2693.79 ; R19.1@4844.39,2719.39 cw(c4818.79,2693.79) 4855,2693.79 ; R19.1@4844.39,2719.39 cw(c4818.79,2693.79) 4855,2693.79 ; 4855,2316.21 ccw(c4891.21,2316.21) D29.1@4865.61,2290.61 ; 4855,2316.21 ccw(c4891.21,2316.21) D29.1@4865.61,2290.61 ; 4855,2316.21 ccw(c4891.21,2316.21) D29.1@4865.61,2290.61 ; 4855,2693.79 cw(c4891.21,2693.79) R19.1@4865.61,2719.39 ; 4855,2693.79 cw(c4891.21,2693.79) R19.1@4865.61,2719.39 ; 4855,2693.79 cw(c4891.21,2693.79) R19.1@4865.61,2719.39
NetF3_2: F3.2 K1.4 K1.13 K2.4 K2.13 K3.4 K3.13 K4.4 K4.13 | length 2454.4
  Bottom Layer w50: F3.2@3695,2995 3695,3110 3540,3265 3540,3659.92 K1.13@3635.63,3755.55 K1.4@3935.63,3755.55 K2.13@4065.63,3755.55 K2.4@4365.63,3755.55 K3.13@4495.63,3755.55 K3.4@4795.63,3755.55 K4.13@4925.63,3755.55 K4.4@5225.63,3755.55
NetK1_6: K1.6 K1.11 | length 300
  Bottom Layer w50: K1.11@3636.36,3961.3 K1.6@3936.36,3961.3
NetK2_6: K2.6 K2.11 | length 300
  Bottom Layer w50: K2.11@4068.36,3961.3 K2.6@4368.36,3961.3
NetK3_6: K3.6 K3.11 | length 300
  Bottom Layer w50: K3.11@4500.36,3961.3 K3.6@4800.36,3961.3
NetK4_6: K4.6 K4.11 | length 300
  Bottom Layer w50: K4.11@4932.36,3961.3 K4.6@5232.36,3961.3
NetL1_1: L1.1 P1.13 P1.14 | length 1709.5
  Top Layer w30: v1(3730,1590) 3780,1640 L1.1@3780,1675 ; 3764.09,1640.43 ccw(c3745.62,1658.91) L1.1@3770.48,1666.93 ; v1@3727.41,1599.66 ccw(c3717.37,1637.12) 3750.96,1617.73 ; v1@3727.41,1599.66 ccw(c3717.37,1637.12) 3750.96,1617.73 ; v1@3727.41,1599.66 ccw(c3717.37,1637.12) 3750.96,1617.73 ; v1@3727.41,1599.66 ccw(c3717.37,1637.12) 3750.96,1617.73 ; v1@3727.41,1599.66 ccw(c3717.37,1637.12) 3750.96,1617.73 ; v1@3727.41,1599.66 ccw(c3717.37,1637.12) 3750.96,1617.73 ; v1@3741.72,1601.72 ccw(c3673.43,1670) L1.1@3770,1670 ; v1@3741.72,1601.72 ccw(c3673.43,1670) L1.1@3770,1670 ; v1@3741.72,1601.72 ccw(c3673.43,1670) L1.1@3770,1670 ; 3758.39,1626.66 cw(c3813.56,1611.87) L1.1@3785,1661.34 ; 3758.39,1626.66 cw(c3813.56,1611.87) L1.1@3785,1661.34 ; 3758.39,1626.66 cw(c3813.56,1611.87) L1.1@3785,1661.34
  Bottom Layer w30: P1.14@3590,1215 P1.13@3590,1315 3590,1450 v1(3730,1590) ; P1.14@3577.63,1227.37 ccw(c3547.75,1257.25) 3590,1257.25 ; P1.14@3577.63,1227.37 ccw(c3547.75,1257.25) 3590,1257.25 ; P1.14@3577.63,1227.37 ccw(c3547.75,1257.25) 3590,1257.25 ; P1.13@3577.63,1302.63 cw(c3547.75,1272.75) 3590,1272.75 ; P1.13@3577.63,1302.63 cw(c3547.75,1272.75) 3590,1272.75 ; P1.13@3577.63,1302.63 cw(c3547.75,1272.75) 3590,1272.75 ; P1.13@3577.63,1327.37 ccw(c3547.75,1357.25) 3590,1357.25 ; P1.13@3577.63,1327.37 ccw(c3547.75,1357.25) 3590,1357.25 ; P1.13@3577.63,1327.37 ccw(c3547.75,1357.25) 3590,1357.25 ; 3590,1257.25 ccw(c3632.25,1257.25) P1.14@3602.37,1227.37 ; 3590,1257.25 ccw(c3632.25,1257.25) P1.14@3602.37,1227.37 ; 3590,1257.25 ccw(c3632.25,1257.25) P1.14@3602.37,1227.37 ; 3590,1272.75 cw(c3632.25,1272.75) P1.13@3602.37,1302.63 ; 3590,1272.75 cw(c3632.25,1272.75) P1.13@3602.37,1302.63 ; 3590,1272.75 cw(c3632.25,1272.75) P1.13@3602.37,1302.63 ; 3590,1357.25 ccw(c3632.25,1357.25) P1.13@3602.37,1327.37 ; 3590,1357.25 ccw(c3632.25,1357.25) P1.13@3602.37,1327.37 ; 3590,1357.25 ccw(c3632.25,1357.25) P1.13@3602.37,1327.37
NetLS1_1: LS1.1 P2.3 | length 1903.9
  Bottom Layer w100: LS1.1@6136.73,3575.39 6204.61,3575.39 6547,3233 P2.3@6880,3233 ; LS1.1@6145.56,3548.04 cw(c6168.61,3476.59) 6221.71,3529.68 ; LS1.1@6136.73,3546.65 cw(c6136.73,3313.41) 6301.66,3478.34 ; LS1.1@6136.73,3546.65 cw(c6136.73,3313.41) 6301.66,3478.34 ; LS1.1@6136.73,3546.65 cw(c6136.73,3313.41) 6301.66,3478.34 ; LS1.1@6161.62,3589.76 ccw(c6303.79,3671.85) 6261.3,3513.28 ; LS1.1@6161.62,3589.76 ccw(c6303.79,3671.85) 6261.3,3513.28 ; LS1.1@6161.62,3589.76 ccw(c6303.79,3671.85) 6261.3,3513.28
NetLS1_3: LS1.3 LS2.3 P4.3 | length 2931.7
  Top Layer w100: LS1.3@6211.54,2906.1 6211.54,3126.54 6410,3325 6410,3720 6211.54,3918.46 LS2.3@6211.54,4000.91 ; LS2.3@6202.09,3984.54 cw(c6148.11,3891.06) 6252.38,3919 ; LS2.3@6202.09,3984.54 cw(c6148.11,3891.06) 6252.38,3919 ; LS2.3@6202.09,3984.54 cw(c6148.11,3891.06) 6252.38,3919 ; LS2.3@6230.43,4000.91 ccw(c6475.09,4000.91) 6302.09,3827.91 ; LS2.3@6230.43,4000.91 ccw(c6475.09,4000.91) 6302.09,3827.91 ; LS2.3@6230.43,4000.91 ccw(c6475.09,4000.91) 6302.09,3827.91
  Bottom Layer w100: LS1.3@6211.54,2906.1 6629.64,2488 P4.3@6880,2488
NetLS2_1: LS2.1 P3.3 | length 1588.8
  Top Layer w80: LS2.1@6136.73,4653.9 LS2.1@6136.73,4670.2
  Bottom Layer w80: LS2.1@6136.73,4670.2 6685,4121.93 6685,3975 6720,3940 P3.3@6880,3940 ; LS2.1@6136.73,4631.46 cw(c6136.73,4537.93) 6202.87,4604.06 ; LS2.1@6136.73,4631.46 cw(c6136.73,4537.93) 6202.87,4604.06 ; LS2.1@6136.73,4631.46 cw(c6136.73,4537.93) 6202.87,4604.06 ; LS2.1@6175.47,4670.2 ccw(c6269,4670.2) 6202.87,4604.06 ; LS2.1@6175.47,4670.2 ccw(c6269,4670.2) 6202.87,4604.06 ; LS2.1@6175.47,4670.2 ccw(c6269,4670.2) 6202.87,4604.06
NetP1_1: P1.1 U5.8 | length 2079.7
  Top Layer w12: U5.8@3003.07,1914.29 3003.07,1581.93 3045,1540 3995,1540 4190,1345 P1.1@4190,1315 ; U5.8@2985.39,1877.61 cw(c2942.72,1834.94) 3003.07,1834.94 ; U5.8@2985.39,1877.61 cw(c2942.72,1834.94) 3003.07,1834.94 ; U5.8@2985.39,1877.61 cw(c2942.72,1834.94) 3003.07,1834.94 ; U5.8@2993.88,1886.1 cw(c2971.69,1863.91) 3003.07,1863.91 ; U5.8@2993.88,1886.1 cw(c2971.69,1863.91) 3003.07,1863.91 ; U5.8@2993.88,1886.1 cw(c2971.69,1863.91) 3003.07,1863.91 ; 3003.07,1834.94 cw(c3063.43,1834.94) U5.8@3020.75,1877.61 ; 3003.07,1834.94 cw(c3063.43,1834.94) U5.8@3020.75,1877.61 ; 3003.07,1834.94 cw(c3063.43,1834.94) U5.8@3020.75,1877.61 ; 3003.07,1863.91 cw(c3034.46,1863.91) U5.8@3012.26,1886.1 ; 3003.07,1863.91 cw(c3034.46,1863.91) U5.8@3012.26,1886.1 ; 3003.07,1863.91 cw(c3034.46,1863.91) U5.8@3012.26,1886.1
NetP1_2: P1.2 U5.6 | length 3400.4
  Top Layer w12: U5.6@2803.07,1914.29 2803.07,1576.93 2862,1518 3972,1518 4140,1350 4140,1265 P1.2@4190,1215 ; U5.6@2785.39,1877.61 cw(c2742.72,1834.94) 2803.07,1834.94 ; U5.6@2785.39,1877.61 cw(c2742.72,1834.94) 2803.07,1834.94 ; U5.6@2785.39,1877.61 cw(c2742.72,1834.94) 2803.07,1834.94 ; U5.6@2793.88,1886.1 cw(c2771.69,1863.91) 2803.07,1863.91 ; U5.6@2793.88,1886.1 cw(c2771.69,1863.91) 2803.07,1863.91 ; U5.6@2793.88,1886.1 cw(c2771.69,1863.91) 2803.07,1863.91 ; 2803.07,1834.94 cw(c2863.43,1834.94) U5.6@2820.75,1877.61 ; 2803.07,1834.94 cw(c2863.43,1834.94) U5.6@2820.75,1877.61 ; 2803.07,1834.94 cw(c2863.43,1834.94) U5.6@2820.75,1877.61 ; 2803.07,1863.91 cw(c2834.46,1863.91) U5.6@2812.26,1886.1 ; 2803.07,1863.91 cw(c2834.46,1863.91) U5.6@2812.26,1886.1 ; 2803.07,1863.91 cw(c2834.46,1863.91) U5.6@2812.26,1886.1 ; 4144.76,1260.24 ccw(c4190,1305.48) P1.2@4190,1241.5 ; 4144.76,1260.24 cw(c4099.52,1215) P1.2@4163.5,1215 ; 4144.76,1260.24 ccw(c4190,1305.48) P1.2@4190,1241.5 ; 4144.76,1260.24 cw(c4099.52,1215) P1.2@4163.5,1215 ; 4144.76,1260.24 ccw(c4190,1305.48) P1.2@4190,1241.5 ; 4144.76,1260.24 cw(c4099.52,1215) P1.2@4163.5,1215 ; 4152.71,1251.49 cw(c4140.19,1204.8) P1.2@4187.55,1214.5 ; 4152.71,1251.49 cw(c4140.19,1204.8) P1.2@4187.55,1214.5 ; 4152.71,1251.49 cw(c4140.19,1204.8) P1.2@4187.55,1214.5 ; 4153.51,1252.29 ccw(c4200.2,1264.81) P1.2@4190.5,1217.45 ; 4153.51,1252.29 ccw(c4200.2,1264.81) P1.2@4190.5,1217.45 ; 4153.51,1252.29 ccw(c4200.2,1264.81) P1.2@4190.5,1217.45 ; 4158.53,1233.54 ccw(c4195.84,1243.53) P1.2@4188.09,1205.69 ; 4158.53,1233.54 ccw(c4195.84,1243.53) P1.2@4188.09,1205.69 ; 4158.53,1233.54 ccw(c4195.84,1243.53) P1.2@4188.09,1205.69 ; 4165.25,1239.75 ccw(c4190,1264.51) P1.2@4190,1229.5 ; 4165.25,1239.75 cw(c4140.49,1215) P1.2@4175.5,1215 ; 4165.25,1239.75 ccw(c4190,1264.51) P1.2@4190,1229.5 ; 4165.25,1239.75 cw(c4140.49,1215) P1.2@4175.5,1215 ; 4165.25,1239.75 ccw(c4190,1264.51) P1.2@4190,1229.5 ; 4165.25,1239.75 cw(c4140.49,1215) P1.2@4175.5,1215 ; 4171.46,1246.47 cw(c4161.47,1209.16) P1.2@4199.31,1216.91 ; 4171.46,1246.47 cw(c4161.47,1209.16) P1.2@4199.31,1216.91 ; 4171.46,1246.47 cw(c4161.47,1209.16) P1.2@4199.31,1216.91
NetP1_3: P1.3 U5.4 | length 2627.4
  Top Layer w12: U5.4@2603.07,1914.29 2603.07,1571.93 2680,1495 3963.89,1495 4090,1368.89 ; P1.3@4090,1315 4090,1368.89 ; U5.4@2585.39,1877.61 cw(c2542.72,1834.94) 2603.07,1834.94 ; U5.4@2585.39,1877.61 cw(c2542.72,1834.94) 2603.07,1834.94 ; U5.4@2585.39,1877.61 cw(c2542.72,1834.94) 2603.07,1834.94 ; U5.4@2593.88,1886.1 cw(c2571.69,1863.91) 2603.07,1863.91 ; U5.4@2593.88,1886.1 cw(c2571.69,1863.91) 2603.07,1863.91 ; U5.4@2593.88,1886.1 cw(c2571.69,1863.91) 2603.07,1863.91 ; 2603.07,1834.94 cw(c2663.43,1834.94) U5.4@2620.75,1877.61 ; 2603.07,1834.94 cw(c2663.43,1834.94) U5.4@2620.75,1877.61 ; 2603.07,1834.94 cw(c2663.43,1834.94) U5.4@2620.75,1877.61 ; 2603.07,1863.91 cw(c2634.46,1863.91) U5.4@2612.26,1886.1 ; 2603.07,1863.91 cw(c2634.46,1863.91) U5.4@2612.26,1886.1 ; 2603.07,1863.91 cw(c2634.46,1863.91) U5.4@2612.26,1886.1 ; P1.3@4073.82,1335.99 ccw(c4048.47,1368.88) 4090,1368.88 ; P1.3@4073.82,1335.99 ccw(c4048.47,1368.88) 4090,1368.88 ; P1.3@4073.82,1335.99 ccw(c4048.47,1368.88) 4090,1368.88 ; 4090,1368.88 ccw(c4131.53,1368.88) P1.3@4106.18,1335.99 ; 4090,1368.88 ccw(c4131.53,1368.88) P1.3@4106.18,1335.99 ; 4090,1368.88 ccw(c4131.53,1368.88) P1.3@4106.18,1335.99
NetP1_4: P1.4 U5.2 | length 3690.8
  Top Layer w12: U5.2@2403.07,1914.29 2403.07,1576.93 2507,1473 3900.59,1473 4040,1333.59 4040,1265 P1.4@4090,1215 ; U5.2@2385.39,1877.61 cw(c2342.72,1834.94) 2403.07,1834.94 ; U5.2@2385.39,1877.61 cw(c2342.72,1834.94) 2403.07,1834.94 ; U5.2@2385.39,1877.61 cw(c2342.72,1834.94) 2403.07,1834.94 ; U5.2@2393.88,1886.1 cw(c2371.69,1863.91) 2403.07,1863.91 ; U5.2@2393.88,1886.1 cw(c2371.69,1863.91) 2403.07,1863.91 ; U5.2@2393.88,1886.1 cw(c2371.69,1863.91) 2403.07,1863.91 ; 2403.07,1834.94 cw(c2463.43,1834.94) U5.2@2420.75,1877.61 ; 2403.07,1834.94 cw(c2463.43,1834.94) U5.2@2420.75,1877.61 ; 2403.07,1834.94 cw(c2463.43,1834.94) U5.2@2420.75,1877.61 ; 2403.07,1863.91 cw(c2434.46,1863.91) U5.2@2412.26,1886.1 ; 2403.07,1863.91 cw(c2434.46,1863.91) U5.2@2412.26,1886.1 ; 2403.07,1863.91 cw(c2434.46,1863.91) U5.2@2412.26,1886.1 ; 4044.76,1260.24 ccw(c4090,1305.48) P1.4@4090,1241.5 ; 4044.76,1260.24 cw(c3999.52,1215) P1.4@4063.5,1215 ; 4044.76,1260.24 ccw(c4090,1305.48) P1.4@4090,1241.5 ; 4044.76,1260.24 cw(c3999.52,1215) P1.4@4063.5,1215 ; 4044.76,1260.24 ccw(c4090,1305.48) P1.4@4090,1241.5 ; 4044.76,1260.24 cw(c3999.52,1215) P1.4@4063.5,1215 ; 4052.71,1251.49 cw(c4040.19,1204.8) P1.4@4087.55,1214.5 ; 4052.71,1251.49 cw(c4040.19,1204.8) P1.4@4087.55,1214.5 ; 4052.71,1251.49 cw(c4040.19,1204.8) P1.4@4087.55,1214.5 ; 4053.51,1252.29 ccw(c4100.2,1264.81) P1.4@4090.5,1217.45 ; 4053.51,1252.29 ccw(c4100.2,1264.81) P1.4@4090.5,1217.45 ; 4053.51,1252.29 ccw(c4100.2,1264.81) P1.4@4090.5,1217.45 ; 4058.53,1233.54 ccw(c4095.84,1243.53) P1.4@4088.09,1205.69 ; 4058.53,1233.54 ccw(c4095.84,1243.53) P1.4@4088.09,1205.69 ; 4058.53,1233.54 ccw(c4095.84,1243.53) P1.4@4088.09,1205.69 ; 4065.25,1239.75 ccw(c4090,1264.51) P1.4@4090,1229.5 ; 4065.25,1239.75 cw(c4040.49,1215) P1.4@4075.5,1215 ; 4065.25,1239.75 ccw(c4090,1264.51) P1.4@4090,1229.5 ; 4065.25,1239.75 cw(c4040.49,1215) P1.4@4075.5,1215 ; 4065.25,1239.75 ccw(c4090,1264.51) P1.4@4090,1229.5 ; 4065.25,1239.75 cw(c4040.49,1215) P1.4@4075.5,1215 ; 4071.46,1246.47 cw(c4061.47,1209.16) P1.4@4099.31,1216.91 ; 4071.46,1246.47 cw(c4061.47,1209.16) P1.4@4099.31,1216.91 ; 4071.46,1246.47 cw(c4061.47,1209.16) P1.4@4099.31,1216.91
NetP1_5: P1.5 U8.8 | length 2695.2
  Top Layer w12: U8.8@2183.07,1914.29 2183.07,1576.93 2309,1451 3871.23,1451 3990,1332.23 P1.5@3990,1315 ; U8.8@2165.39,1877.61 cw(c2122.72,1834.94) 2183.07,1834.94 ; U8.8@2165.39,1877.61 cw(c2122.72,1834.94) 2183.07,1834.94 ; U8.8@2165.39,1877.61 cw(c2122.72,1834.94) 2183.07,1834.94 ; U8.8@2173.88,1886.1 cw(c2151.69,1863.91) 2183.07,1863.91 ; U8.8@2173.88,1886.1 cw(c2151.69,1863.91) 2183.07,1863.91 ; U8.8@2173.88,1886.1 cw(c2151.69,1863.91) 2183.07,1863.91 ; 2183.07,1834.94 cw(c2243.43,1834.94) U8.8@2200.75,1877.61 ; 2183.07,1834.94 cw(c2243.43,1834.94) U8.8@2200.75,1877.61 ; 2183.07,1834.94 cw(c2243.43,1834.94) U8.8@2200.75,1877.61 ; 2183.07,1863.91 cw(c2214.46,1863.91) U8.8@2192.26,1886.1 ; 2183.07,1863.91 cw(c2214.46,1863.91) U8.8@2192.26,1886.1 ; 2183.07,1863.91 cw(c2214.46,1863.91) U8.8@2192.26,1886.1
NetP1_6: P1.6 U8.6 | length 3767.4
  Top Layer w12: U8.6@1983.07,1914.29 1983.07,1846.93 ; P1.6@3990,1215 3940,1265 3940,1351.11 3862.11,1429 2161,1429 2015,1575 2015,1815 1983.07,1846.93 ; U8.6@1968.62,1874.89 cw(c1948.8,1846.93) 1983.07,1846.93 ; U8.6@1968.62,1874.89 cw(c1948.8,1846.93) 1983.07,1846.93 ; U8.6@1968.62,1874.89 cw(c1948.8,1846.93) 1983.07,1846.93 ; 1983.07,1846.93 cw(c2017.34,1846.93) U8.6@1997.53,1874.89 ; 1983.07,1846.93 cw(c2017.34,1846.93) U8.6@1997.53,1874.89 ; 1983.07,1846.93 cw(c2017.34,1846.93) U8.6@1997.53,1874.89 ; 3944.76,1260.24 ccw(c3990,1305.48) P1.6@3990,1241.5 ; 3944.76,1260.24 cw(c3899.52,1215) P1.6@3963.5,1215 ; 3944.76,1260.24 ccw(c3990,1305.48) P1.6@3990,1241.5 ; 3944.76,1260.24 cw(c3899.52,1215) P1.6@3963.5,1215 ; 3944.76,1260.24 ccw(c3990,1305.48) P1.6@3990,1241.5 ; 3944.76,1260.24 cw(c3899.52,1215) P1.6@3963.5,1215 ; 3952.71,1251.49 cw(c3940.19,1204.8) P1.6@3987.55,1214.5 ; 3952.71,1251.49 cw(c3940.19,1204.8) P1.6@3987.55,1214.5 ; 3952.71,1251.49 cw(c3940.19,1204.8) P1.6@3987.55,1214.5 ; 3953.51,1252.29 ccw(c4000.2,1264.81) P1.6@3990.5,1217.45 ; 3953.51,1252.29 ccw(c4000.2,1264.81) P1.6@3990.5,1217.45 ; 3953.51,1252.29 ccw(c4000.2,1264.81) P1.6@3990.5,1217.45 ; 3958.53,1233.54 ccw(c3995.84,1243.53) P1.6@3988.09,1205.69 ; 3958.53,1233.54 ccw(c3995.84,1243.53) P1.6@3988.09,1205.69 ; 3958.53,1233.54 ccw(c3995.84,1243.53) P1.6@3988.09,1205.69 ; 3965.25,1239.75 ccw(c3990,1264.51) P1.6@3990,1229.5 ; 3965.25,1239.75 cw(c3940.49,1215) P1.6@3975.5,1215 ; 3965.25,1239.75 ccw(c3990,1264.51) P1.6@3990,1229.5 ; 3965.25,1239.75 cw(c3940.49,1215) P1.6@3975.5,1215 ; 3965.25,1239.75 ccw(c3990,1264.51) P1.6@3990,1229.5 ; 3965.25,1239.75 cw(c3940.49,1215) P1.6@3975.5,1215 ; 3971.46,1246.47 cw(c3961.47,1209.16) P1.6@3999.31,1216.91 ; 3971.46,1246.47 cw(c3961.47,1209.16) P1.6@3999.31,1216.91 ; 3971.46,1246.47 cw(c3961.47,1209.16) P1.6@3999.31,1216.91
NetP1_7: P1.7 U8.4 | length 2936.5
  Top Layer w12: U8.4@1783.07,1914.29 1783.07,1851.93 ; P1.7@3890,1315 3890,1370 ; U8.4@1770.55,1873.66 cw(c1757.97,1851.93) 1783.07,1851.93 ; U8.4@1770.55,1873.66 cw(c1757.97,1851.93) 1783.07,1851.93 ; U8.4@1770.55,1873.66 cw(c1757.97,1851.93) 1783.07,1851.93 ; 1783.07,1851.93 cw(c1808.17,1851.93) U8.4@1795.6,1873.66 ; 1783.07,1851.93 cw(c1808.17,1851.93) U8.4@1795.6,1873.66 ; 1783.07,1851.93 cw(c1808.17,1851.93) U8.4@1795.6,1873.66 ; 1783.07,1851.93 1845,1790 1845,1587 2025,1407 3853,1407 3890,1370 ; P1.7@3873.49,1335.73 ccw(c3846.18,1370) 3890,1370 ; P1.7@3873.49,1335.73 ccw(c3846.18,1370) 3890,1370 ; P1.7@3873.49,1335.73 ccw(c3846.18,1370) 3890,1370 ; 3890,1370 ccw(c3933.82,1370) P1.7@3906.51,1335.73 ; 3890,1370 ccw(c3933.82,1370) P1.7@3906.51,1335.73 ; 3890,1370 ccw(c3933.82,1370) P1.7@3906.51,1335.73
NetP1_8: P1.8 U8.2 | length 4868.2
  Top Layer w12: U8.2@1583.07,1914.29 1583.07,1876.93 1646,1814 1646,1639 1900,1385 3788.59,1385 3840,1333.59 3840,1265 P1.8@3890,1215 ; U8.2@1595.78,1873.76 cw(c1601.96,1863.3) 1609.57,1872.78 cw(c1616.62,1881.55) U8.2@1606.21,1885.82 ; U8.2@1579.83,1882.7 cw(c1570.55,1846.64) 1606.53,1856.27 ; U8.2@1579.83,1882.7 cw(c1570.55,1846.64) 1606.53,1856.27 ; U8.2@1579.83,1882.7 cw(c1570.55,1846.64) 1606.53,1856.27 ; U8.2@1582.67,1894.38 cw(c1555.98,1833.74) 1619.97,1850.89 ; U8.2@1582.67,1894.38 cw(c1555.98,1833.74) 1619.97,1850.89 ; U8.2@1582.67,1894.38 cw(c1555.98,1833.74) 1619.97,1850.89 ; U8.2@1583.07,1870.29 cw(c1583.07,1854.27) 1594.4,1865.6 ; U8.2@1583.07,1870.29 cw(c1583.07,1854.27) 1594.4,1865.6 ; U8.2@1583.07,1870.29 cw(c1583.07,1854.27) 1594.4,1865.6 ; U8.2@1584.07,1895.29 ccw(c1630.82,1895.29) 1597.76,1862.24 ; U8.2@1584.07,1895.29 ccw(c1630.82,1895.29) 1597.76,1862.24 ; U8.2@1584.07,1895.29 ccw(c1630.82,1895.29) 1597.76,1862.24 ; U8.2@1587.5,1905.36 cw(c1568.91,1863.11) 1613.49,1875.06 ; U8.2@1587.5,1905.36 cw(c1568.91,1863.11) 1613.49,1875.06 ; U8.2@1587.5,1905.36 cw(c1568.91,1863.11) 1613.49,1875.06 ; U8.2@1596.07,1895.29 ccw(c1671.79,1895.29) 1618.25,1841.75 ; U8.2@1596.07,1895.29 ccw(c1671.79,1895.29) 1618.25,1841.75 ; U8.2@1596.07,1895.29 ccw(c1671.79,1895.29) 1618.25,1841.75 ; 1602.98,1869.52 cw(c1619.86,1874.05) U8.2@1604.72,1882.79 ; 1602.98,1869.52 cw(c1619.86,1874.05) U8.2@1604.72,1882.79 ; 1602.98,1869.52 cw(c1619.86,1874.05) U8.2@1604.72,1882.79 ; U8.2@1608.07,1895.29 ccw(c1712.76,1895.29) 1638.73,1821.27 ; U8.2@1608.07,1895.29 ccw(c1712.76,1895.29) 1638.73,1821.27 ; U8.2@1608.07,1895.29 ccw(c1712.76,1895.29) 1638.73,1821.27 ; 3844.76,1260.24 ccw(c3890,1305.48) P1.8@3890,1241.5 ; 3844.76,1260.24 cw(c3799.52,1215) P1.8@3863.5,1215 ; 3844.76,1260.24 ccw(c3890,1305.48) P1.8@3890,1241.5 ; 3844.76,1260.24 cw(c3799.52,1215) P1.8@3863.5,1215 ; 3844.76,1260.24 ccw(c3890,1305.48) P1.8@3890,1241.5 ; 3844.76,1260.24 cw(c3799.52,1215) P1.8@3863.5,1215 ; 3852.71,1251.49 cw(c3840.19,1204.8) P1.8@3887.55,1214.5 ; 3852.71,1251.49 cw(c3840.19,1204.8) P1.8@3887.55,1214.5 ; 3852.71,1251.49 cw(c3840.19,1204.8) P1.8@3887.55,1214.5 ; 3853.51,1252.29 ccw(c3900.2,1264.81) P1.8@3890.5,1217.45 ; 3853.51,1252.29 ccw(c3900.2,1264.81) P1.8@3890.5,1217.45 ; 3853.51,1252.29 ccw(c3900.2,1264.81) P1.8@3890.5,1217.45 ; 3858.53,1233.54 ccw(c3895.84,1243.53) P1.8@3888.09,1205.69 ; 3858.53,1233.54 ccw(c3895.84,1243.53) P1.8@3888.09,1205.69 ; 3858.53,1233.54 ccw(c3895.84,1243.53) P1.8@3888.09,1205.69 ; 3865.25,1239.75 ccw(c3890,1264.51) P1.8@3890,1229.5 ; 3865.25,1239.75 cw(c3840.49,1215) P1.8@3875.5,1215 ; 3865.25,1239.75 ccw(c3890,1264.51) P1.8@3890,1229.5 ; 3865.25,1239.75 cw(c3840.49,1215) P1.8@3875.5,1215 ; 3865.25,1239.75 ccw(c3890,1264.51) P1.8@3890,1229.5 ; 3865.25,1239.75 cw(c3840.49,1215) P1.8@3875.5,1215 ; 3871.46,1246.47 cw(c3861.47,1209.16) P1.8@3899.31,1216.91 ; 3871.46,1246.47 cw(c3861.47,1209.16) P1.8@3899.31,1216.91 ; 3871.46,1246.47 cw(c3861.47,1209.16) P1.8@3899.31,1216.91
NetP1_9: P1.9 U1.8 | length 2103.9
  Bottom Layer w12: P1.9@3790,1315 3790,1370 ; U1.8@4643.07,1914.29 4643.07,1883.07 4385,1625 4045,1625 3790,1370 ; P1.9@3773.49,1335.73 ccw(c3746.18,1370) 3790,1370 ; P1.9@3773.49,1335.73 ccw(c3746.18,1370) 3790,1370 ; P1.9@3773.49,1335.73 ccw(c3746.18,1370) 3790,1370 ; 3790,1370 ccw(c3833.82,1370) P1.9@3806.51,1335.73 ; 3790,1370 ccw(c3833.82,1370) P1.9@3806.51,1335.73 ; 3790,1370 ccw(c3833.82,1370) P1.9@3806.51,1335.73 ; 4591.75,1831.75 ccw(c4528.21,1895.29) U1.8@4618.07,1895.29 ; 4591.75,1831.75 ccw(c4528.21,1895.29) U1.8@4618.07,1895.29 ; 4591.75,1831.75 ccw(c4528.21,1895.29) U1.8@4618.07,1895.29 ; 4607.19,1854.68 cw(c4663.56,1839.58) U1.8@4643.42,1894.35 ; 4607.19,1854.68 cw(c4663.56,1839.58) U1.8@4643.42,1894.35 ; 4607.19,1854.68 cw(c4663.56,1839.58) U1.8@4643.42,1894.35 ; 4612.24,1852.24 ccw(c4569.18,1895.29) U1.8@4630.07,1895.29 ; 4612.24,1852.24 ccw(c4569.18,1895.29) U1.8@4630.07,1895.29 ; 4612.24,1852.24 ccw(c4569.18,1895.29) U1.8@4630.07,1895.29 ; 4613.18,1877.04 cw(c4653.79,1866.16) U1.8@4639.27,1905.62 ; 4613.18,1877.04 cw(c4653.79,1866.16) U1.8@4639.27,1905.62 ; 4613.18,1877.04 cw(c4653.79,1866.16) U1.8@4639.27,1905.62 ; 4621.25,1861.25 cw(c4643.07,1839.44) U1.8@4643.07,1870.29 ; 4621.25,1861.25 cw(c4643.07,1839.44) U1.8@4643.07,1870.29 ; 4621.25,1861.25 cw(c4643.07,1839.44) U1.8@4643.07,1870.29